# Altium PCB FingerVeinUSB_V1.PcbDoc
Units mm, origin at the board's own origin, x right, y up, seen from the top; angles counter-clockwise.
Board outline 40.25 x 50.25 mm, 2 copper layers (Top Layer, Bottom Layer); 32 components, 32 nets, 130 pads, 39 vias.
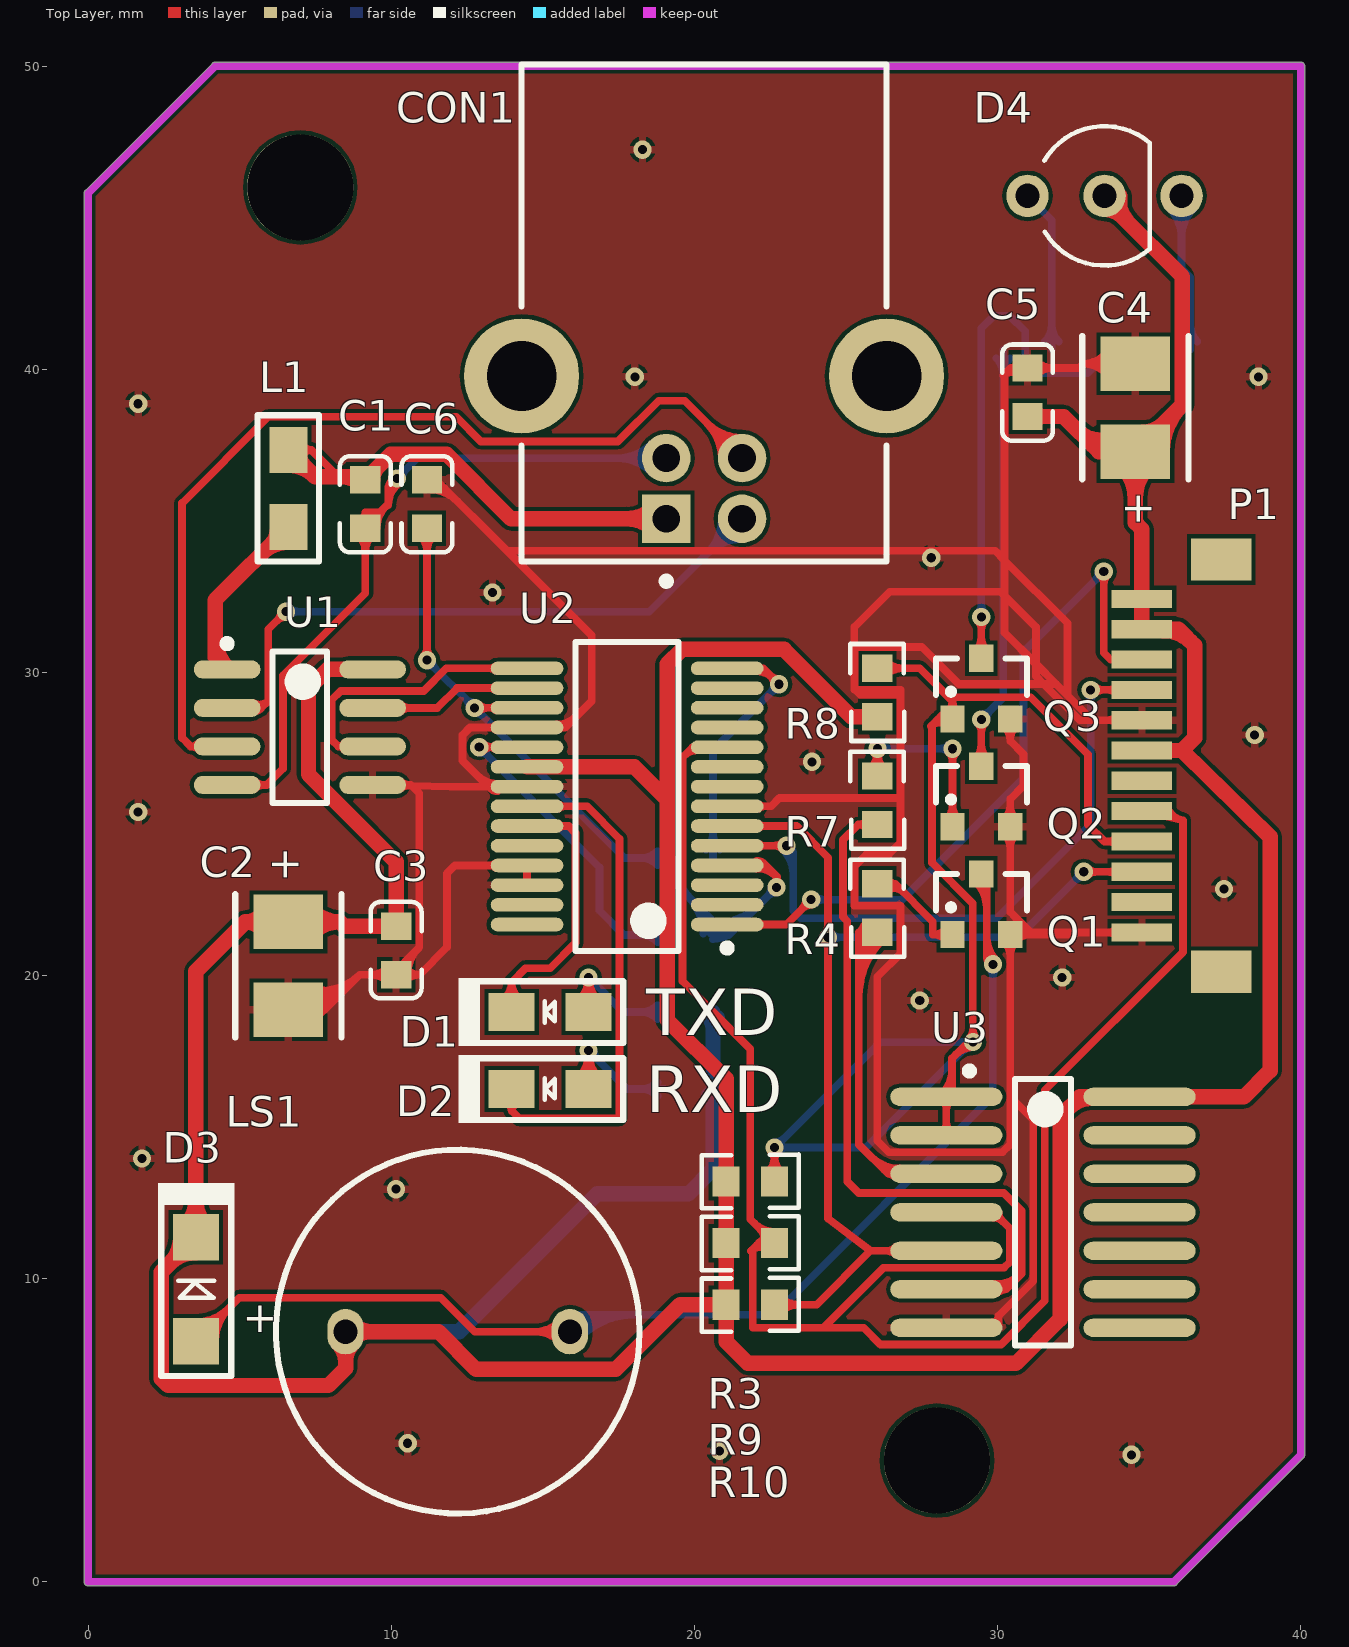
[diagram p0: Top Layer view]
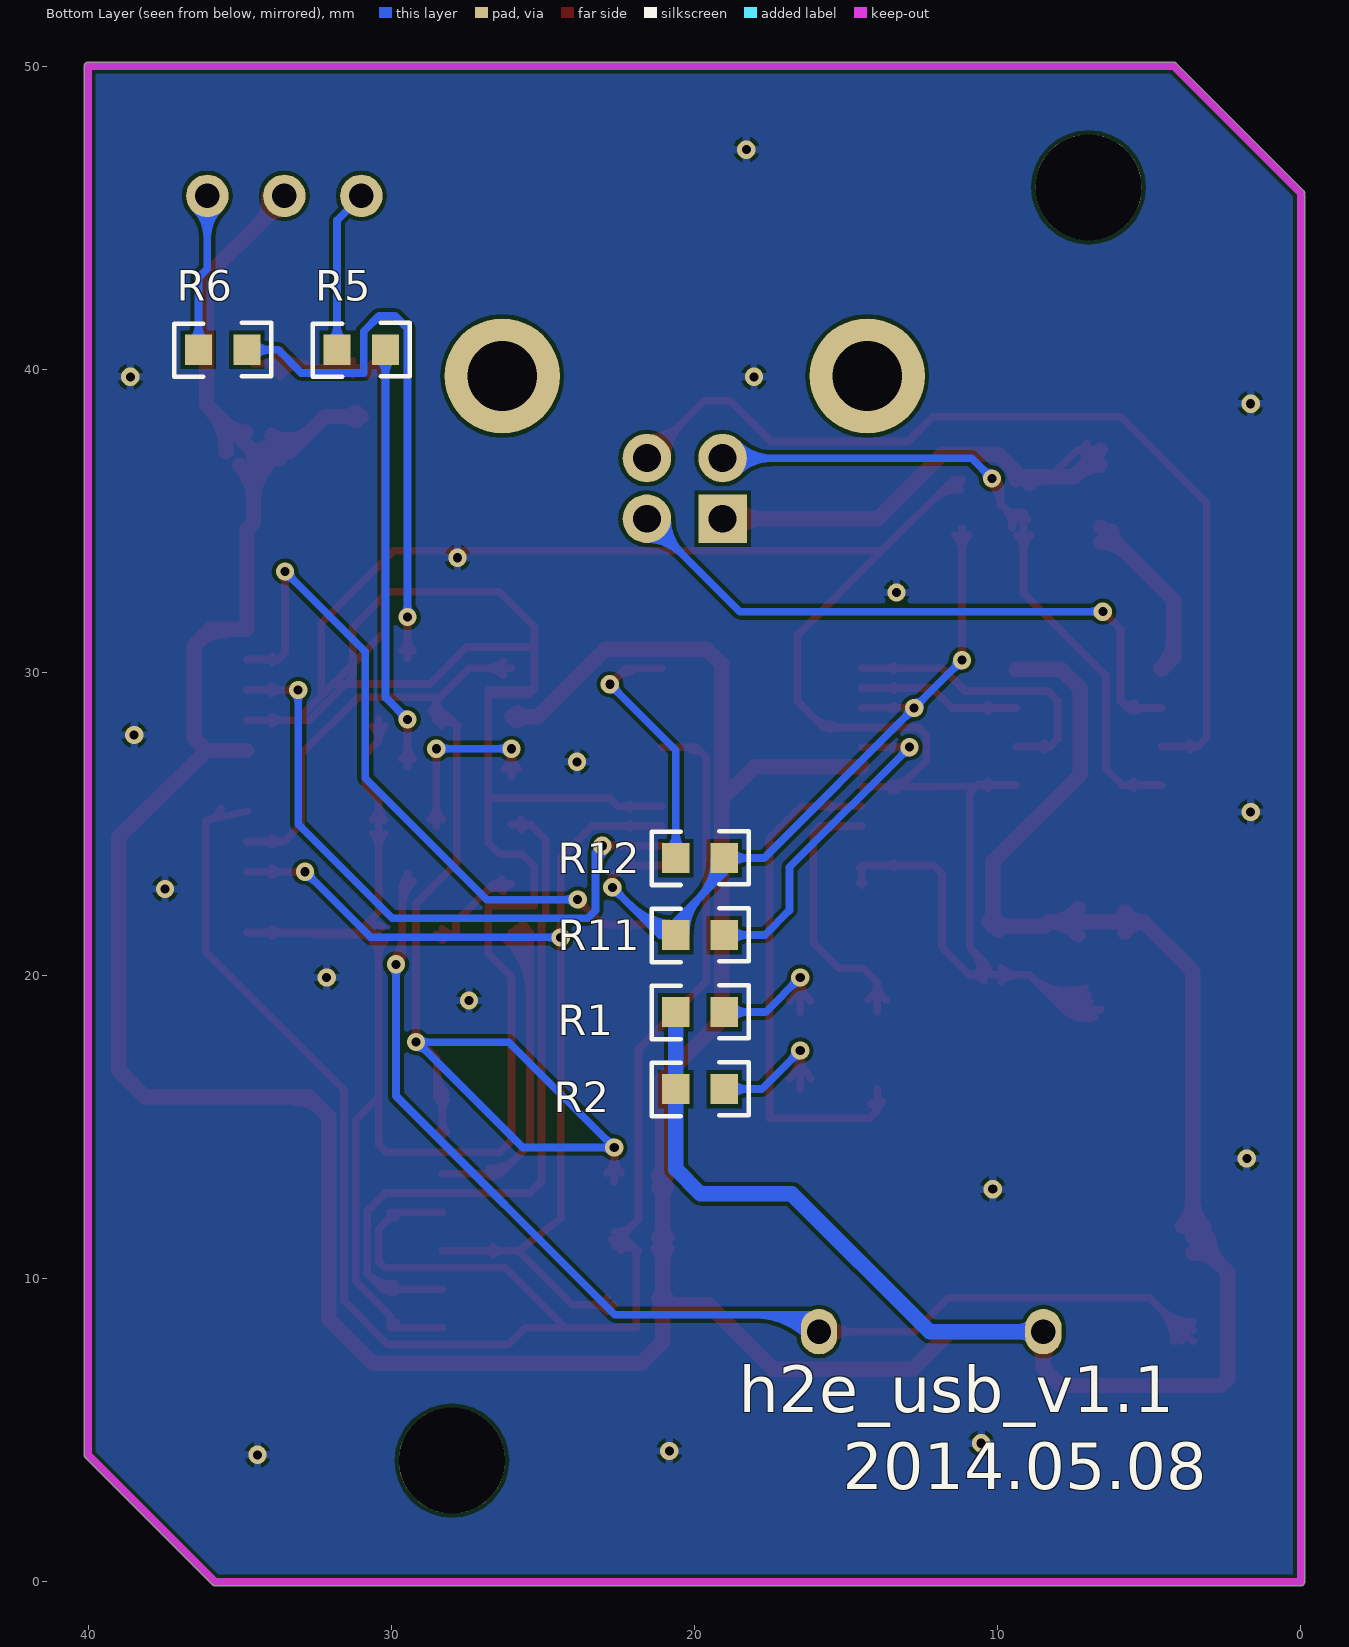
[diagram p1: Bottom Layer view, seen from below]
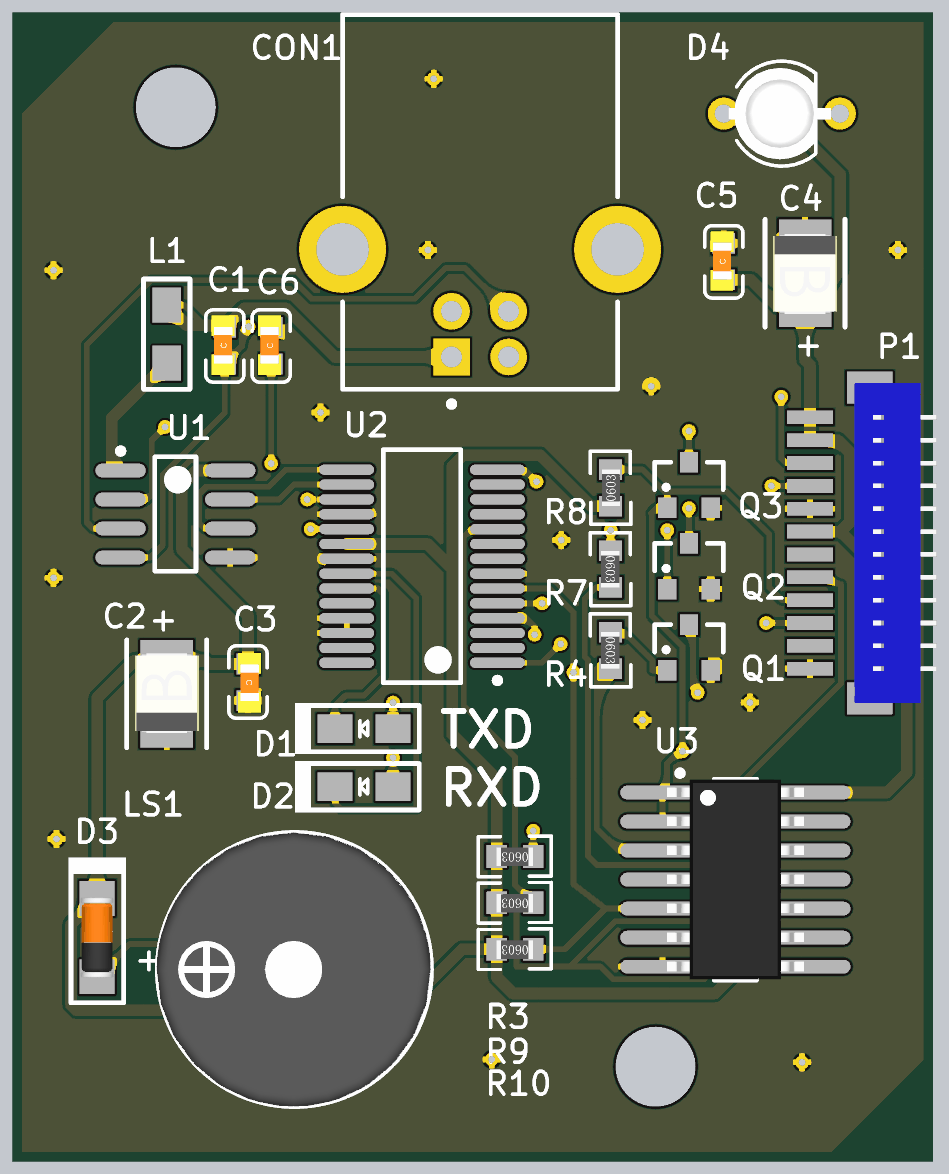
[diagram p2: 3D render of the assembled board from above, using the file's embedded part models]
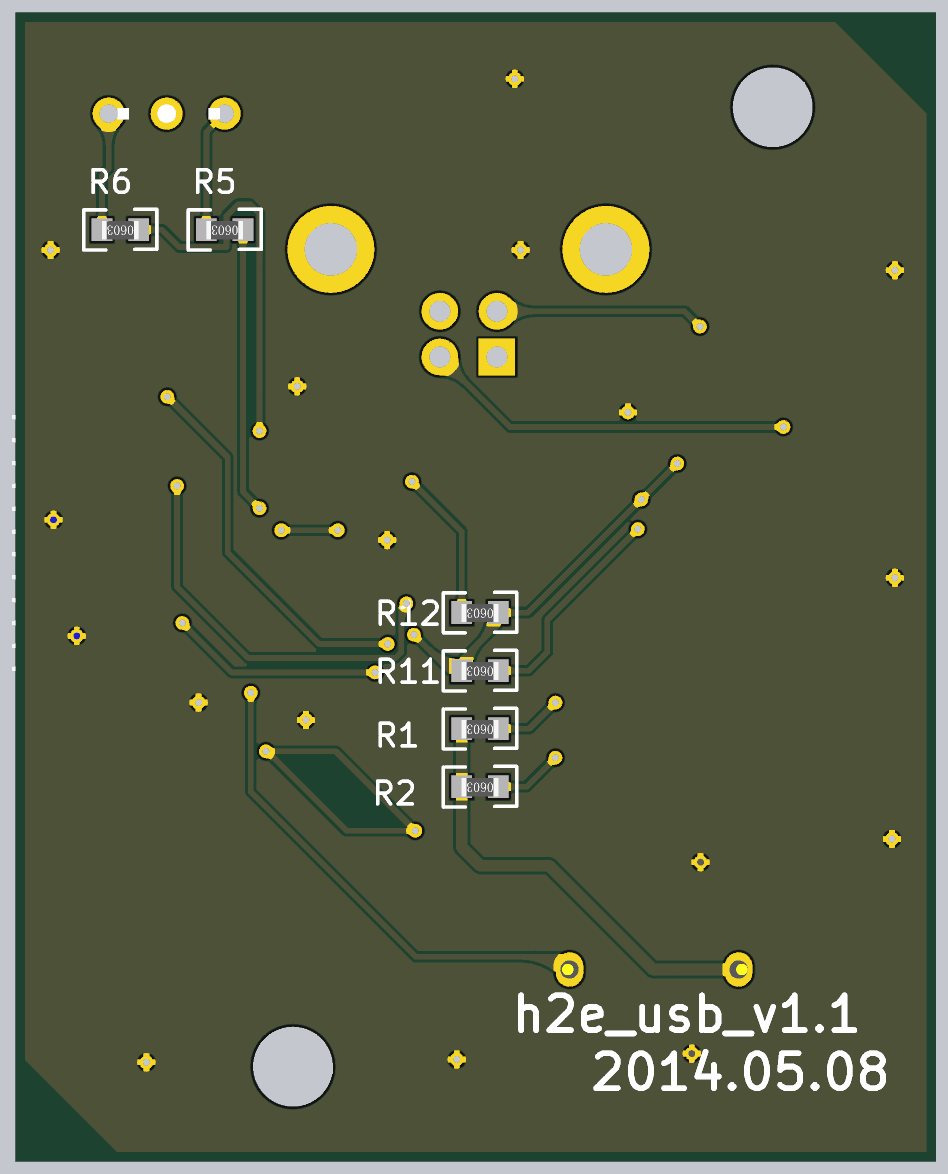
[diagram p3: 3D render of the assembled board from below, using the file's embedded part models]

## Layer stack, top to bottom
Top Layer: signal copper 0.0356
Dielectric: dielectric 0.32, FR-4, Dk 4.8
Bottom Layer: signal copper 0.0356

## Board outline
-0.127,0 -0.127,45.72 cw(c0,45.72) -0.119,45.765 cw(c0,45.809) -0.09,45.899 4.101,50.09 4.1,50.09 cw(c4.191,50) 4.191,50.127 40,50.127 cw(c40,50) 40.127,50 40.127,4.186 cw(c40,4.186) 40.09,4.096 35.904,-0.09 35.905,-0.09 cw(c35.814,0) 35.814,-0.127 0,-0.127 cw(c0,0)

## Design rules (kind name [scope] priority, off if disabled: settings)
Clearance [All] p1: gap=0.127
ComponentClearance [All] p1: gap=0 collisioncheckmode=3 verticalgap=0.254 showdistances=FALSE
MinimumSolderMaskSliver [All] p1: minsoldermaskwidth=0.01
PolygonConnect [All] p1: connectstyle=Relief reliefconductorwidth=0.254 reliefentries=4 polygonreliefangle="90 Angle"
RoutingVias [All] p1: holewidth=0.3 width=0.6 viastyle="Through Hole" minholewidth=0.3 minwidth=0.6 maxholewidth=0.3 maxwidth=0.6
SilkToSilkClearance [All] p1: silktosilkclearance=0.127
SilkscreenOverComponentPads [All] p1: minsilkscreentomaskgap=0
SolderMaskExpansion [All] p1: expansion=0.102
TestPointUsage [All] p1: valid=0 allowmultiple=FALSE
Testpoint [All] p1: side=15 testpointundercomponent=TRUE minsize=1.016 maxsize=2.54 preferedsize=1.524 minholesize=0 maxholesize=1.016 preferedholesize=0.813 testpointgrid=0.025 style=1023 order=0-112345678
Width Width_VCC [InNet('VCC')] p1: maxlimit=0.508 minlimit=0.254 preferedwidth=0.508
Width [All] p2: maxlimit=0.508 minlimit=0.254 preferedwidth=0.254
20 further rules are at their usual default settings.

## Classes and differential pairs
component class U_FT232: C1 C2 C3 C6 CON1 D1 D2 L1 R1 R2 R11 R12 U1 U2
component class U_H2E_Port: C4 C5 D3 D4 LS1 P1 Q1 Q2 Q3 R3 R4 R5 R6 R7 R8 R9 R10 U3

## Components (designator, comment, footprint, x,y, rotation, side; value= is the part's Value field where it differs from the comment)
C1 "CAP" C0603 9.144,35.56 r270 top
C2 "CAP+" T3528 6.604,20.32 r270 top
C3 "CAP" C0603 10.16,20.828 r90 top
C4 "CAP+" T3528 34.544,38.735 r90 top
C5 "CAP" C0603 30.988,39.243 r270 top
C6 "CAP" C0603 11.176,35.56 r270 top
CON1 "USB" USB2.5-2H4D 20.32,36.068 r90 top
D1 "LED" D0805 15.24,18.796 r180 top
D2 "LED" D0805 15.24,16.256 r180 top
D3 "1N4148" D1206 3.556,9.652 r90 top
D4 "LED_R&G_1" LED_R&G 33.528,45.72 r0 top
L1 "INDUCTOR" L0805 6.604,36.068 r270 top
LS1 "Speaker" BUZZER 12.192,8.255 r0 top
P1 "JST" "JST BM12B-SRSS-TB" 36.068,26.924 r270 top
Q1 "NPN" SOT23/BEC 29.464,22.352 r0 top
Q2 "NPN" SOT23/BEC 29.464,25.908 r0 top
Q3 "NPN" SOT23/BEC 29.464,29.464 r0 top
R1 "res" R0603 19.812,18.796 r0 bottom
R2 "res" R0603 19.812,16.256 r0 bottom
R3 "Res1" R0603 21.844,13.208 r180 top
R4 "Res1" R0603 26.035,22.225 r90 top
R5 "Res1" R0603 30.988,40.64 r0 bottom
R6 "Res1" R0603 35.56,40.64 r0 bottom
R7 "Res1" R0603 26.035,25.781 r90 top
R8 "Res1" R0603 26.035,29.337 r270 top
R9 "Res1" R0603 21.844,11.176 r180 top
R10 "Res1" R0603 21.844,9.144 r180 top
R11 "res" R0603 19.812,21.336 r0 bottom
R12 "res" R0603 19.812,23.876 r0 bottom
U1 "USB6Bx" SO8 6.985,28.194 r0 top
U2 "FT232" SSOP-28 17.78,25.908 r180 top
U3 "74ALS00" SOIC-14 31.496,12.192 r0 top

## Footprints (in the part's own frame and the unit in brackets; to place one, negate y for a bottom-side part, rotate by r counter-clockwise, add the part's x,y. Pads: shape width x height; smd on the part's side, far side on the other; paste and mask are expansions set on the pad)
BUZZER [mm]
  oval 1.2x1.5 hole 0.8: 1(-3.7,0) 2(3.7,0)
  silkscreen extent -6,-6 6,6, body extent -6.03,-6 5.97,6, height 9.3
C0603 [mm] "Chip Capacitor, 2-Leads, Body 1.6x0.8mm, IPC Medium Density"
  rect 0.9x1 smd: 1(-0.8,0) 2(0.8,0)
  silkscreen extent -1.57,-0.84 1.6,0.84, body extent -1.3,-0.51 1.3,0.49, height 0.89
D0805 [mm]
  rect 1.524x1.25 smd: 1(-1.27,0) 2(1.27,0)
  silkscreen extent -2.41,-1.12 3.02,1.12
D1206 [mil]
  rect 60x60 smd: 1(-67.5,0) 2(67.5,0)
  silkscreen extent -112,-50 138,49, body extent -69,-29 69,29, height 56
"JST BM12B-SRSS-TB" [mm] "BM12B-SRSS-TB"
  rect 1.4x2 smd: 0(-6.8,1.308) 0(6.8,1.308)
  rect 0.6x2 smd: 1(-5.5,-1.308) 2(-4.5,-1.308) 3(-3.5,-1.308) 4(-2.5,-1.308) 5(-1.5,-1.308) 6(-0.5,-1.308) 7(0.5,-1.308) 8(1.5,-1.308) 9(2.5,-1.308) 10(3.5,-1.308) 11(4.5,-1.308) 12(5.5,-1.308)
  body extent -7,-1.57 7,2.03, height 4.25
L0805 [mm]
  rect 1.524x1.25 smd: 1(-1.27,0) 2(1.27,0)
  silkscreen extent -2.41,-1.02 2.41,1.02
LED_R&G [mm]
  round 1.4 hole 0.8: 1(-2.54,0) 2(0,0) 3(2.54,0)
  silkscreen extent -1.98,-2.3 1.49,2.3, body extent -2.34,-2 2.16,2, height 12.43
R0603 [mm]
  rect 0.9x1 smd: 1(-0.8,0) 2(0.8,0)
  silkscreen extent -1.6,-0.89 1.6,0.89, body extent -0.8,-0.38 0.8,0.42, height 0.45
SO8 [mm] "SOIC, 8-Leads, Body 5.0x4.0mm (max), Pitch 1.27mm, IPC Medium Density"
  oval 2.2x0.6 smd: 1(-2.4,1.905) 2(-2.4,0.635) 3(-2.4,-0.635) 4(-2.4,-1.905) 5(2.4,-1.905) 6(2.4,-0.635) 7(2.4,0.635) 8(2.4,1.905)
  silkscreen extent -2.52,-2.5 0.9,2.88, body extent -2,-2.5 2,2.5, height 1.75
SOIC-14 [mm] "SOIC, 14-Leads, Body 8.8x4.0mm (max), Pitch 1.27mm, IPC Medium Density"
  oval 3.7x0.6 smd: 1(-3.187,3.81) 2(-3.187,2.54) 3(-3.187,1.27) 4(-3.187,0) 5(-3.187,-1.27) 6(-3.187,-2.54) 7(-3.187,-3.81) 8(3.187,-3.81) 9(3.187,-2.54) 10(3.187,-1.27) 11(3.187,0) 12(3.187,1.27) 13(3.187,2.54) 14(3.187,3.81)
  silkscreen extent -2.55,-4.4 0.93,4.78, body extent -3,-4.37 3,4.38, height 1.75
SOT23/BEC [mm]
  rect 0.8x0.9 smd: B(-0.95,-1) C(0,1) E(0.95,-1)
  silkscreen extent -1.5,-0.2 1.5,1
SSOP-28 [mm] "SOP, 28-Leads, Body 10.2x5.3mm (max), Pitch 0.65mm, IPC Medium Density"
  oval 2.4x0.45 smd: 1(-3.3,4.225) 2(-3.3,3.575) 3(-3.3,2.925) 4(-3.3,2.275) 5(-3.3,1.625) 6(-3.3,0.975) 7(-3.3,0.325) 8(-3.3,-0.325) 9(-3.3,-0.975) 10(-3.3,-1.625) 11(-3.3,-2.275) 12(-3.3,-2.925) 13(-3.3,-3.575) 14(-3.3,-4.225) 15(3.3,-4.225) 16(3.3,-3.575) 17(3.3,-2.925) 18(3.3,-2.275) 19(3.3,-1.625) 20(3.3,-0.975) 21(3.3,-0.325) 22(3.3,0.325) 23(3.3,0.975) 24(3.3,1.625) 25(3.3,2.275) 26(3.3,2.925) 27(3.3,3.575) 28(3.3,4.225)
  silkscreen extent -3.43,-5.1 1.7,5.12, body extent -2.65,-5.1 2.65,5.1, height 2
T3528 [mm] "Molded Capacitor, 2-Leads, Body 3.5x2.8mm, IPC Medium Density"
  rect 1.8x2.3 smd: 1(-1.45,0) 2(1.45,0)
  silkscreen extent -2.36,-1.75 2.36,1.75, body extent -1.78,-1.4 1.72,1.4, height 1.9
USB2.5-2H4D [mm] "Connector; USB1.1, Type B, Thru-Hole; 4 Position; Right Angle"
  rect 1.6x1.6 hole 0.92: 1(-1,1.25)
  round 1.6 hole 0.92: 2(-1,-1.25) 3(1,-1.25) 4(1,1.25)
  round 3.8 hole 2.3: 5(3.71,6.02) 6(3.71,-6.02)
  silkscreen extent -3.18,-6.02 13.99,6.02

## Part data
C1 C3 C5 C6: "Capacitor"
D3: library part "Diode 1N4148", "High Conductance Fast Diode"
LS1: "Loudspeaker"
P1: library part "Header 12", "Header, 12-Pin"
Q1 Q2 Q3: "NPN Transistor"
R3 R4 R5 R6 R7 R8 R9 R10: "Resistor"

## Free pads (board coordinates)
  round 3.5 hole 3.5 unplated: 0(7,46) 1(28,4)

## Via types
v1: diameter 0.6, hole 0.3, Top Layer to Bottom Layer, 39 vias

## Nets (pads, with @x,y where several pads share a name; then routed paths per layer and width w, separated by ;. In a path a pad name is that pad's centre, name@x,y a point inside that pad or via, vN(x,y) a via of type N, cw(c..) or ccw(c..) an arc to the next point about the centre after c; other vN are vias at no path point)
BUSY: P1.7
CTRLLED: R7.1 U3.6 | length 26.6
  Top Layer w0.254: R7.1@25.712,24.809 ccw(c25.4,24.613) 25.4,24.981 ; R7.1@25.712,25.153 cw(c25.4,25.349) 25.4,24.981 ; R7.1 25.4,24.981 ; U3.6 30.278,9.652 30.794,10.168 ; U3.6@29.853,9.571 ccw(c29.904,10.273) 30.401,9.775 ; U3.6@29.871,9.825 ccw(c29.957,11.006) 30.794,10.168 ; U3.6@29.981,9.53 cw(c30.277,9.234) 30.277,9.652 cw(c30.277,10.07) U3.6@29.981,9.774 ; 25.4,24.981 24.9,24.481 24.9,21.94 25.044,21.796 25.044,13.208 25.425,12.827 30.201,12.827 30.794,12.234 30.794,10.168
GND: C2.2 C3.1 C4.2 C5.1 C6.1 P1.5 P1.12 Q1.E Q2.E Q3.E U1.5 U2.7 U2.18 U2.21 U2.25 U2.26 U3.7 | length 222.6
  Top Layer w0.254: C2.2 7.798,18.87 ; C2.2@6.775,18.64 ccw(c7.1,19.584) 7.806,18.878 ; C2.2@6.858,18.88 ccw(c7.247,20.012) 8.093,19.166 ; C2.2@6.94,19.121 ccw(c7.395,20.439) 8.381,19.453 ; C2.2@7.023,19.361 ccw(c7.542,20.867) 8.668,19.741 ; C2.2@7.106,19.601 ccw(c7.689,21.295) 8.956,20.028 ; C2.2@7.612,18.718 cw(c7.798,18.68) 7.798,18.87 ; C2.2@7.612,19.022 ccw(c7.798,19.06) 7.798,18.87 ; C3.1@9.882,19.8 ccw(c9.33,19.248) 9.33,20.028 ccw(c9.33,20.808) C3.1@9.882,20.256 ; C3.1@10.279,20.028 cw(c10.903,20.028) C3.1@10.462,20.47 ; U1.5@10.305,26.164 cw(c10.552,25.905) 10.56,26.263 ; U1.5@10.307,26.167 cw(c10.603,25.871) 10.603,26.289 cw(c10.603,26.707) U1.5@10.307,26.411 ; U1.5@10.31,26.409 ccw(c10.655,26.739) 10.644,26.261 ; C3.1@10.45,19.812 cw(c10.935,19.376) 10.935,20.028 ; C3.1@10.45,20.244 ccw(c10.935,20.68) 10.935,20.028 ; C3.1@10.491,20.187 cw(c10.755,20.335) 10.541,20.549 ; C3.1@10.533,20.028 cw(c11.771,20.028) 10.896,20.903 ; C6.1 C6.1@11.468,36.36 ; 12.831,26.61 ccw(c13.505,27.285) U2.21@13.505,26.331 ; 13.264,26.177 ccw(c13.505,26.417) U2.21@13.505,26.077 ; U2.25@13.436,23.564 ccw(c13.268,23.396) 13.268,23.633 ccw(c13.268,23.87) U2.25@13.436,23.702 ; U2.18@13.436,28.114 ccw(c13.268,27.946) 13.268,28.183 ccw(c13.268,28.42) U2.18@13.436,28.252 ; U2.26@14.411,23.052 ccw(c14.243,23.22) 14.48,23.22 ccw(c14.717,23.22) U2.26@14.549,23.052 ; U2.25@14.411,23.564 cw(c14.243,23.396) 14.48,23.396 cw(c14.717,23.396) U2.25@14.549,23.564 ; U2.26 U2.25 12.101,23.633 11.836,23.368 11.836,20.93 10.935,20.028 ; U2.18@15.455,28.281 ccw(c15.455,29.198) 16.104,28.55 ; U2.18@15.524,28.114 cw(c15.692,27.946) 15.692,28.183 cw(c15.692,28.42) U2.18@15.524,28.252 ; U2.7 22.53,25.583 22.804,25.857 26.797,25.857 ; U2.7@22.124,25.514 cw(c22.292,25.346) 22.292,25.583 cw(c22.292,25.82) U2.7@22.124,25.652 ; U3.7 30.032,8.382 30.032,8.78 ; U3.7@29.835,8.553 ccw(c29.804,8.78) 30.032,8.78 ; 30.194,39.795 cw(c30.462,39.527) C5.1@30.719,39.806 ; Q2.E@30.221,24.665 cw(c29.755,24.199) 30.414,24.199 cw(c31.073,24.199) Q2.E@30.607,24.665 ; Q2.E@30.221,25.151 ccw(c29.755,25.617) 30.414,25.617 ccw(c31.073,25.617) Q2.E@30.607,25.151 ; Q3.E@30.221,28.221 cw(c29.755,27.755) 30.414,27.755 cw(c31.073,27.755) Q3.E@30.607,28.221 ; 30.246,39.847 cw(c30.677,39.416) C5.1@30.912,39.979 ; Q1.E@30.288,21.6 cw(c30.591,21.124) 30.99,21.523 ; 30.381,39.982 cw(c30.641,39.721) C5.1@30.891,39.992 ; Q3.E 30.414,27.741 30.856,27.298 30.856,26.265 30.414,25.823 Q2.E 30.414,22.1 30.788,21.726 31.09,21.424 32.609,21.424 ; 30.528,21.986 cw(c30.119,21.577) Q1.E@30.616,21.282 ; Q1.E@30.607,21.159 cw(c31.073,20.693) 31.073,21.352 cw(c31.073,22.011) Q1.E@30.607,21.545 ; C5.1@30.643,39.912 ccw(c30.442,39.823) 30.442,40.043 ; C5.1@30.643,40.174 cw(c30.442,40.263) 30.442,40.043 ; C5.1@31.266,39.815 cw(c31.818,39.263) 31.818,40.043 cw(c31.818,40.823) C5.1@31.266,40.271 ; C4.2@33.655,39.75 ccw(c32.832,39.189) 32.832,40.185 ; C4.2@33.655,40.62 cw(c32.832,41.181) 32.832,40.185 ; C4.2@33.865,39.893 ccw(c33.312,39.516) 33.312,40.185 ccw(c33.312,40.854) C4.2@33.865,40.477 ; C4.2 32.832,40.185 ; 7.798,18.87 8.956,20.028 ; 8.956,20.028 C3.1 ; C3.1 C3.1@10.541,20.028 ; C3.1 C3.1@10.541,20.028 ; C3.1@10.541,20.028 10.541,20.549 ; C3.1@10.541,20.028 10.935,20.028 ; 10.541,20.549 10.922,20.93 10.922,26.01 10.671,26.261 ; 10.671,26.261 11.943,26.233 13.208,26.233 ; 10.671,26.261 U1.5 10.643,26.289 10.671,26.261 ; C6.1@11.468,36.36 13.818,34.011 ; C6.1@11.468,36.36 13.818,34.011 ; 13.208,26.233 12.349,27.092 12.349,27.934 12.598,28.183 U2.18 15.737,28.183 16.612,29.058 16.612,31.217 13.818,34.011 ; 13.208,26.233 U2.21 13.208,26.233 ; 13.268,26.233 cw(c13.268,25.996) U2.21@13.436,26.164 ; 13.268,26.233 ccw(c13.268,26.47) U2.21@13.436,26.302 ; 13.268,26.233 cw(c13.268,25.996) U2.21@13.436,26.164 ; 13.268,26.233 ccw(c13.268,26.47) U2.21@13.436,26.302 ; 13.268,26.233 cw(c13.268,25.996) U2.21@13.436,26.164 ; 13.268,26.233 ccw(c13.268,26.47) U2.21@13.436,26.302 ; 13.268,26.233 cw(c13.268,25.996) U2.21@13.436,26.164 ; 13.268,26.233 ccw(c13.268,26.47) U2.21@13.436,26.302 ; 13.818,34.011 29.921,34.011 30.226,33.706 ; 25.281,29.456 25.281,30.841 27.503,30.841 28.727,29.616 31.523,29.616 ; 25.281,29.456 25.281,29.433 25.304,29.433 ; 25.281,29.456 25.273,29.464 25.273,31.496 26.441,32.664 30.099,32.664 30.226,32.537 ; 25.281,29.456 25.304,29.433 ; 25.304,29.433 26.797,29.433 26.797,29.261 ; 25.304,29.433 25.476,29.261 26.797,29.261 ; 26.797,25.857 26.797,29.261 ; 26.797,25.857 26.797,24.384 26.416,24.003 25.679,24.003 25.281,23.605 25.281,22.301 26.797,22.301 26.797,20.726 26.035,19.964 26.035,14.554 26.416,14.173 30.16,14.173 30.414,14.427 30.414,16.002 ; 30.032,8.78 31.175,9.923 31.175,15.241 30.414,16.002 ; 30.226,32.537 31.267,31.496 31.267,30.278 ; 30.226,32.537 30.226,33.706 ; 30.226,32.537 30.226,31.32 31.267,30.278 ; 30.226,33.706 32.309,31.623 32.309,29.237 ; 30.226,33.706 30.226,39.827 30.442,40.043 ; 30.414,16.002 Q1.E ; 30.414,16.002 Q1.E ; 30.414,20.643 cw(c31.073,20.643) 30.607,21.109 ccw(c31.073,20.643) 30.414,20.643 ; 30.414,20.643 ccw(c29.755,20.643) 30.221,21.109 cw(c29.755,20.643) 30.414,20.643 ; Q1.E 32.537,21.352 32.609,21.424 ; 30.442,40.043 C5.1 32.69,40.043 32.832,40.185 ; 31.267,30.278 31.929,29.616 ; 31.267,30.278 31.267,29.872 31.523,29.616 ; 31.523,29.616 32.715,28.424 33.122,28.424 ; 31.523,29.616 31.929,29.616 ; 31.929,29.616 32.309,29.237 ; 31.929,29.616 32.309,29.237 ; 32.309,29.237 33.122,28.424 ; 32.309,29.237 33.122,28.424 ; 32.309,29.237 33.122,28.424 ; 32.609,21.424 P1.12 32.609,21.424 ; 33.122,28.424 P1.5 33.122,28.424 ; 33.642,21.424 cw(c33.642,21.006) 33.938,21.302 ccw(c33.642,21.006) 33.642,21.424 ; 33.642,21.424 ccw(c33.642,21.842) 33.938,21.546 cw(c33.642,21.842) 33.642,21.424 ; 33.642,28.424 cw(c33.642,28.006) 33.938,28.302 ccw(c33.642,28.006) 33.642,28.424 ; 33.642,28.424 ccw(c33.642,28.842) 33.938,28.546 cw(c33.642,28.842) 33.642,28.424 ; C6.1@11.226,36.037 cw(c11.226,34.672) 12.191,35.637 ccw(c11.226,34.672) C6.1@11.226,36.037 ; C6.1@11.226,36.291 cw(c11.226,35.54) 11.757,36.071 ccw(c11.226,35.54) C6.1@11.226,36.291
  other v1: 34.417,4.191 20.828,4.318 10.541,4.572 10.16,12.954 1.778,13.97 27.432,19.177 32.131,19.939 37.465,22.86 1.651,25.4 23.876,27.051 38.481,27.94 13.335,32.639 27.813,33.782 1.651,38.862 18.034,39.751 38.608,39.751 18.288,47.244
NetC1_1: C1.1 CON1.1 L1.1 | length 23.4
  Top Layer w0.254: L1.1 7.366,37.338 ; L1.1@7.06,37.138 cw(c7.366,37.004) 7.366,37.338 ; L1.1@7.06,37.538 ccw(c7.366,37.672) 7.366,37.338 ; C1.1@8.859,36.138 ccw(c8.344,35.651) 8.344,36.36 ; C1.1@8.859,36.582 cw(c8.344,37.069) 8.344,36.36 ; C1.1 8.344,36.36 ; 7.366,37.338 8.255,36.449 8.344,36.36
  Top Layer w0.508: L1.1@6.604,36.83 cw(c6.604,35.604) 7.471,36.471 ; L1.1 7.493,36.449 9.144,36.449 9.233,36.449 9.975,37.191 11.834,37.191 13.957,35.068 CON1.1 ; L1.1@6.975,37.201 ccw(c7.54,37.201) L1.1@7.14,36.802 ; 8.406,36.449 cw(c8.406,35.672) C1.1@8.955,36.221 ; C1.1@9.39,36.36 cw(c9.984,36.36) C1.1@9.564,36.78 ; CON1.1@18.684,34.682 ccw(c17.752,33.75) 17.752,35.068 ccw(c17.752,36.386) CON1.1@18.684,35.454
NetC1_2: C1.2 CON1.4 U1.4 | length 33.4
  Top Layer w0.254: U1.4 5.893,26.289 6.426,26.822 6.426,29.896 9.144,32.614 C1.2 9.144,35.281 ; U1.4@5.507,26.167 cw(c5.803,25.871) 5.803,26.289 cw(c5.803,26.707) U1.4@5.507,26.411 ; C1.2@8.916,34.532 cw(c8.364,33.98) 9.144,33.98 cw(c9.924,33.98) C1.2@9.372,34.532 ; C1.2@9.001,35.049 ccw(c8.886,35.281) 9.144,35.281 ; C1.2@9.287,35.049 cw(c9.402,35.281) 9.144,35.281 ; C1.2@9.505,34.847 cw(c9.932,34.967) 9.619,35.281 ; C1.2@9.517,34.76 cw(c10.528,34.76) 9.813,35.475 ; 9.901,35.516 cw(c10.808,35.516) v1@10.285,36.257 ; 9.901,36.005 cw(c10.462,36.005) v1@10.139,36.464 ; v1(10.185,36.398) 9.901,36.113 9.901,35.563 9.619,35.281 ; 9.144,35.281 9.619,35.281 ; C1.2@9.194,35.083 ccw(c9.194,35.631) 9.582,35.244 cw(c9.194,35.631) C1.2@9.194,35.083
  Bottom Layer w0.254: v1(10.185,36.398) 10.855,37.068 CON1.4 ; v1@10.185,36.571 ccw(c10.185,36.989) 10.481,36.694 ccw(c10.776,36.398) v1@10.358,36.398 ; CON1.4@18.594,36.592 ccw(c17.445,35.443) 17.445,37.068 ccw(c17.445,38.693) CON1.4@18.594,37.544 ; CON1.4@18.774,36.772 ccw(c18.058,36.056) 18.058,37.068 ccw(c18.058,38.08) CON1.4@18.774,37.364
NetCON1_2: CON1.2 U1.2 | length 27.7
  Top Layer w0.254: U1.2 5.715,28.829 ; U1.2@5.348,28.757 ccw(c5.485,29.024) 5.698,28.812 ; U1.2@5.464,28.983 ccw(c5.653,29.348) 5.944,29.058 ; U1.2@5.527,28.731 cw(c5.715,28.601) 5.715,28.829 ; U1.2@5.527,28.927 ccw(c5.715,29.057) 5.715,28.829 ; v1@6.355,32.004 cw(c5.937,32.004) 6.232,31.709 cw(c6.528,31.413) v1@6.528,31.831 ; v1(6.528,32.004) 5.944,31.42 5.944,29.058 ; 5.715,28.829 5.944,29.058
  Bottom Layer w0.254: v1(6.528,32.004) 18.506,32.004 CON1.2 ; v1@6.65,31.882 cw(c6.945,31.586) 6.945,32.004 cw(c6.945,32.422) v1@6.65,32.126 ; CON1.2@20.897,35.068 cw(c19.272,35.068) 20.421,33.919 cw(c21.57,32.77) CON1.2@21.57,34.395 ; CON1.2@21.151,35.068 cw(c20.139,35.068) 20.855,34.353 cw(c21.57,33.637) CON1.2@21.57,34.649
NetCON1_3: CON1.3 U1.3 | length 35.4
  Top Layer w0.254: U1.3@3.66,27.439 ccw(c3.378,27.167) 3.378,27.559 ; U1.3@3.66,27.679 cw(c3.378,27.951) 3.378,27.559 ; U1.3 3.378,27.559 ; CON1.3@20.897,37.068 ccw(c19.272,37.068) 20.421,38.217 ccw(c21.57,39.366) CON1.3@21.57,37.741 ; CON1.3@21.151,37.068 ccw(c20.139,37.068) 20.855,37.783 ccw(c21.57,38.499) CON1.3@21.57,37.487 ; CON1.3 19.674,38.964 18.821,38.964 17.475,37.617 12.954,37.617 12.141,38.43 5.944,38.43 3.099,35.585 3.099,27.838 3.378,27.559
NetD1_1: D1.1 R1.1 | length 8.4
  Top Layer w0.254: D1.1@16.171,19.161 ccw(c15.447,19.939) v1(16.51,19.939) ; v1@16.388,19.817 cw(c16.092,19.521) 16.51,19.521 cw(c16.928,19.521) v1@16.632,19.817 ; D1.1 v1(16.51,19.939) ; D1.1@16.849,19.161 cw(c17.573,19.939) v1(16.51,19.939)
  Bottom Layer w0.254: v1@16.51,19.766 cw(c16.51,19.348) 16.805,19.644 cw(c17.101,19.939) v1@16.683,19.939 ; v1(16.51,19.939) 17.653,18.796 R1.1 ; R1.1@18.784,18.568 ccw(c18.232,18.016) 18.232,18.796 ccw(c18.232,19.576) R1.1@18.784,19.024
NetD1_2: D1.2 U2.23 | length 10.7
  Top Layer w0.254: D1.2@13.673,19.196 ccw(c13.234,19.787) 13.97,19.787 ; D1.2 13.97,19.787 ; D1.2@14.267,19.196 cw(c14.706,19.787) 13.97,19.787 ; U2.23 15.85,24.933 16.078,24.704 16.078,21.082 15.24,20.244 14.427,20.244 13.97,19.787 ; U2.23@15.524,24.864 cw(c15.692,24.696) 15.692,24.933 cw(c15.692,25.17) U2.23@15.524,25.002
NetD2_1: D2.1 R2.1 | length 8.7
  Top Layer w0.254: D2.1@16.158,16.608 ccw(c15.308,17.458) 16.51,17.458 ccw(c17.712,17.458) D2.1@16.862,16.608 ; v1@16.388,17.404 cw(c16.092,17.108) 16.51,17.108 cw(c16.928,17.108) v1@16.632,17.404 ; D2.1 v1(16.51,17.526)
  Bottom Layer w0.254: v1@16.51,17.353 cw(c16.51,16.935) 16.805,17.231 cw(c17.101,17.526) v1@16.683,17.526 ; v1(16.51,17.526) 17.78,16.256 R2.1 ; R2.1@18.784,16.028 ccw(c18.232,15.476) 18.232,16.256 ccw(c18.232,17.036) R2.1@18.784,16.484
NetD2_2: D2.2 U2.22 | length 18.8
  Top Layer w0.254: D2.2@13.8,15.788 cw(c13.711,15.545) 13.97,15.545 ; D2.2@13.807,15.858 cw(c13.561,15.532) 13.97,15.532 cw(c14.203,15.532) D2.2@14.172,15.762 ; D2.2 13.97,15.545 ; D2.2@14.14,15.788 ccw(c14.229,15.545) 13.97,15.545 ; U2.22 16.459,25.583 17.526,24.516 17.526,15.291 14.224,15.291 13.97,15.545 ; U2.22@15.524,25.514 cw(c15.692,25.346) 15.692,25.583 cw(c15.692,25.82) U2.22@15.524,25.652
NetD3_1: D3.1 LS1.2 Q1.C | length 52.4
  Top Layer w0.254: D3.1 4.991,9.373 11.633,9.373 12.751,8.255 LS1.2 ; D3.1@3.556,8.319 ccw(c3.556,9.238) 4.206,8.588 ccw(c4.857,7.938) D3.1@3.937,7.938 ; D3.1@3.556,8.572 ccw(c3.556,10.106) 4.64,9.022 ccw(c5.724,7.938) D3.1@4.191,7.938 ; LS1.2@15.558,7.921 ccw(c14.75,7.113) 14.75,8.255 ccw(c14.75,9.397) LS1.2@15.558,8.59 ; Q1.C@29.271,23.109 cw(c28.376,22.214) 29.642,22.214 ; Q1.C@29.411,23.034 cw(c29.357,22.754) 29.642,22.754 ; Q1.C@29.451,23.289 cw(c28.989,22.827) 29.642,22.827 ; Q1.C 29.464,22.962 29.642,22.784 29.642,20.574 v1(29.845,20.371) ; 29.642,20.666 ccw(c30.14,20.666) v1@29.788,20.314 ; 29.642,21.279 ccw(c30.753,21.279) v1@29.967,20.493
  Bottom Layer w0.254: LS1.2@15.867,8.43 cw(c16.794,7.503) 16.794,8.814 ; LS1.2 15.892,8.814 22.631,8.814 29.845,16.027 v1(29.845,20.371) ; LS1.2@16.047,8.25 cw(c17.407,6.89) 17.407,8.814 ; LS1.2@16.226,8.071 cw(c18.021,6.276) 18.021,8.814 ; v1@29.723,20.248 cw(c29.427,19.953) 29.845,19.953 cw(c30.263,19.953) v1@29.967,20.248
NetD4_1: D4.1 R5.2 | length 6.6
  Bottom Layer w0.254: D4.1 31.788,44.92 R5.2 ; R5.2@31.56,40.918 ccw(c31.008,41.47) 31.788,41.47 ccw(c32.568,41.47) R5.2@32.016,40.918
NetD4_3: D4.3 R6.2 | length 9.8
  Bottom Layer w0.254: D4.3@35.663,45.315 cw(c34.685,44.337) 36.068,44.337 cw(c37.451,44.337) D4.3@36.473,45.315 ; D4.3@35.842,45.494 cw(c35.298,44.95) 36.068,44.95 cw(c36.838,44.95) D4.3@36.294,45.494 ; D4.3 36.068,43.32 36.36,43.028 R6.2 ; R6.2@36.132,40.918 ccw(c35.58,41.47) 36.36,41.47 ccw(c37.14,41.47) R6.2@36.588,40.918
NetL1_2: L1.2 U1.1 | length 8.4
  Top Layer w0.508: 4.191,31.161 ccw(c5.647,31.161) U1.1@4.618,30.132 ; U1.1 4.191,30.493 4.191,32.385 L1.2 ; 5.737,33.931 cw(c6.604,33.064) L1.2@6.604,34.29 ; L1.2@6.068,34.262 ccw(c5.668,34.661) L1.2@6.233,34.661
NetQ1_B: Q1.B R4.2 | length 6.3
  Top Layer w0.254: R4.2 26.619,23.025 ; R4.2@26.13,22.973 cw(c26.4,22.659) 26.693,22.952 ; R4.2@26.296,22.78 cw(c26.579,22.451) 26.886,22.758 ; R4.2@26.371,22.875 cw(c26.619,22.745) 26.619,23.025 ; R4.2@26.371,23.175 ccw(c26.619,23.305) 26.619,23.025 ; Q1.B@28.319,21.161 ccw(c27.864,20.715) 27.864,21.352 ; Q1.B@28.319,21.543 cw(c27.864,21.989) 27.864,21.352 ; Q1.B 27.864,21.352 ; 26.619,23.025 27.864,21.78 27.864,21.352
NetQ2_B: Q2.B R7.2 | length 10.8
  Top Layer w0.254: R7.2@25.807,26.809 ccw(c25.255,27.361) 26.035,27.361 ccw(c26.815,27.361) R7.2@26.263,26.809 ; v1@25.913,27.36 cw(c25.617,27.065) 26.035,27.065 cw(c26.453,27.065) v1@26.157,27.36 ; R7.2 v1(26.035,27.483) ; Q2.B@28.321,25.151 ccw(c27.855,25.617) 28.514,25.617 ccw(c29.173,25.617) Q2.B@28.707,25.151 ; v1@28.392,27.36 cw(c28.096,27.065) 28.514,27.065 cw(c28.932,27.065) v1@28.636,27.36 ; Q2.B v1(28.514,27.483)
  Bottom Layer w0.254: v1(26.035,27.483) v1(28.514,27.483) ; v1@26.157,27.36 cw(c26.453,27.065) 26.453,27.483 cw(c26.453,27.9) v1@26.157,27.605 ; v1@28.392,27.36 ccw(c28.096,27.065) 28.096,27.483 ccw(c28.096,27.9) v1@28.392,27.605
NetQ2_C: Q2.C R5.1 | length 17.6
  Top Layer w0.254: Q2.C@29.271,27.151 ccw(c28.805,27.617) 29.464,27.617 ccw(c30.123,27.617) Q2.C@29.657,27.151 ; v1@29.342,28.326 cw(c29.046,28.03) 29.464,28.03 cw(c29.882,28.03) v1@29.586,28.326 ; Q2.C v1(29.464,28.448)
  Bottom Layer w0.254: v1(29.464,28.448) 30.188,29.172 R5.1 ; v1@29.464,28.621 ccw(c29.464,29.039) 29.759,28.743 ccw(c30.055,28.448) v1@29.637,28.448 ; R5.1@29.96,40.362 cw(c29.408,39.81) 30.188,39.81 cw(c30.968,39.81) R5.1@30.416,40.362
NetQ3_C: Q3.C R6.1 | length 21.8
  Top Layer w0.254: Q3.C@29.271,30.707 ccw(c28.805,31.173) 29.464,31.173 ccw(c30.123,31.173) Q3.C@29.657,30.707 ; v1@29.342,31.704 cw(c29.046,31.409) 29.464,31.409 cw(c29.882,31.409) v1@29.586,31.704 ; Q3.C v1(29.464,31.826)
  Bottom Layer w0.254: v1@29.342,31.949 ccw(c29.046,32.244) 29.464,32.244 ccw(c29.882,32.244) v1@29.586,31.949 ; v1(29.464,31.826) 29.464,41.351 29.87,41.758 30.404,41.758 30.912,41.25 30.912,39.878 32.969,39.878 33.731,40.64 R6.1 ; R6.1@34.532,40.412 ccw(c33.98,39.86) 33.98,40.64 ccw(c33.98,41.42) R6.1@34.532,40.868
NetR4_1: R4.1 U3.3 | length 19.2
  Top Layer w0.254: 25.425,19.294 cw(c28.116,19.294) R4.1@26.213,21.197 ; 25.425,19.907 cw(c27.503,19.907) R4.1@26.034,21.376 ; 25.425,20.521 cw(c26.89,20.521) R4.1@25.854,21.556 ; 25.425,21.134 cw(c26.276,21.134) R4.1@25.675,21.735 ; R4.1@25.705,21.263 ccw(c25.425,21.102) 25.425,21.425 ; R4.1@25.705,21.587 cw(c25.425,21.748) 25.425,21.425 ; 25.835,14.018 ccw(c26.759,14.942) U3.3@26.759,13.635 ; R4.1 25.425,21.425 ; 26.268,13.584 ccw(c26.759,14.075) U3.3@26.759,13.381 ; U3.3@26.626,13.352 ccw(c26.391,13.156) 26.391,13.462 ; U3.3@26.626,13.572 cw(c26.391,13.768) 26.391,13.462 ; U3.3 26.391,13.462 ; 25.425,21.425 25.425,14.427 26.391,13.462
NetR11_1: R11.1 U2.19 | length 14
  Top Layer w0.254: v1(12.903,27.534) U2.19 ; v1@13.026,27.411 cw(c13.319,27.117) U2.19@13.319,27.533 ; v1@13.026,27.656 ccw(c13.322,27.953) U2.19@13.322,27.533 ; U2.19@13.436,27.464 ccw(c13.268,27.296) 13.268,27.533 ccw(c13.268,27.77) U2.19@13.436,27.602
  Bottom Layer w0.254: v1@12.903,27.361 cw(c12.903,26.943) 13.199,27.238 cw(c13.494,27.534) v1@13.076,27.534 ; v1(12.903,27.534) 16.866,23.571 16.866,22.149 17.678,21.336 R11.1 ; R11.1@18.784,21.108 ccw(c18.232,20.556) 18.232,21.336 ccw(c18.232,22.116) R11.1@18.784,21.564
NetR12_2: R12.2 U2.14 | length 11.7
  Top Layer w0.254: U2.14 22.267,30.133 v1(22.79,29.61) ; U2.14@22.055,30.035 cw(c22.055,29.286) v1@22.585,29.816 ; v1@22.617,29.61 ccw(c22.199,29.61) 22.495,29.905 ccw(c22.79,30.201) v1@22.79,29.783
  Bottom Layer w0.254: R12.2@20.384,24.154 ccw(c19.832,24.706) 20.612,24.706 ccw(c21.392,24.706) R12.2@20.84,24.154 ; R12.2 20.612,27.432 v1(22.79,29.61) ; v1@22.617,29.61 cw(c22.199,29.61) 22.495,29.315 cw(c22.79,29.019) v1@22.79,29.437
NetU1_6: U1.6 U2.15 | length 10.4
  Top Layer w0.254: U1.6@8.443,27.461 ccw(c8.255,27.331) 8.255,27.559 ; U1.6@8.443,27.657 cw(c8.255,27.787) 8.255,27.559 ; U1.6 8.255,27.559 ; U2.15@13.436,30.064 ccw(c13.268,29.896) 13.268,30.133 ccw(c13.268,30.37) U2.15@13.436,30.202 ; U2.15 11.82,30.133 11.074,29.388 8.331,29.388 8.026,29.083 8.026,27.788 8.255,27.559
NetU1_7: U1.7 U2.16 | length 6.4
  Top Layer w0.254: U1.7 11.517,28.829 12.171,29.483 U2.16 ; U1.7@10.307,28.707 cw(c10.603,28.411) 10.603,28.829 cw(c10.603,29.247) U1.7@10.307,28.951 ; U2.16@13.436,29.414 ccw(c13.268,29.246) 13.268,29.483 ccw(c13.268,29.72) U2.16@13.436,29.552
PASS_DRVER: P1.9 Q3.B R3.1 R8.1 U3.1 U3.2 | length 60.8
  Top Layer w0.254: R3.1@22.416,13.486 ccw(c21.864,14.038) 22.644,14.038 ccw(c23.424,14.038) R3.1@22.872,13.486 ; v1@22.522,14.203 cw(c22.226,13.908) 22.644,13.908 cw(c23.062,13.908) v1@22.766,14.203 ; R3.1 v1(22.644,14.326) ; R8.1 27.435,30.137 28.514,29.058 ; R8.1@26.313,29.909 cw(c26.865,29.357) 26.865,30.137 cw(c26.865,30.917) R8.1@26.313,30.365 ; 27.805,28.228 cw(c28.087,27.946) Q3.B@28.34,28.253 ; 27.844,28.267 cw(c28.272,27.839) Q3.B@28.507,28.396 ; 28.003,28.425 cw(c28.266,28.163) Q3.B@28.502,28.449 ; 28.111,28.534 cw(c28.43,28.215) Q3.B@28.605,28.631 ; U3.2@28.187,14.854 ccw(c27.891,15.15) 28.309,15.15 ccw(c28.727,15.15) U3.2@28.431,14.854 ; U3.1@28.187,15.88 cw(c27.891,15.584) 28.309,15.584 cw(c28.727,15.584) U3.1@28.431,15.88 ; U3.1@28.187,16.124 ccw(c27.433,16.878) 28.499,16.878 ; Q3.B@28.277,28.328 ccw(c28.042,28.192) 28.042,28.464 ; Q3.B@28.277,28.6 cw(c28.042,28.736) 28.042,28.464 ; U3.2 U3.1 28.499,16.002 28.499,17.272 29.032,17.805 v1@29.134,17.805 ; U3.1@28.366,15.945 ccw(c28.046,16.265) U3.1@28.499,16.265 ; 28.629,17.402 cw(c29.185,16.847) v1@29.185,17.632 ; v1@29.062,17.928 ccw(c28.767,18.223) 29.185,18.223 ccw(c29.602,18.223) v1@29.307,17.928 ; v1(29.185,17.805) 29.185,22.377 27.838,23.724 27.838,28.261 28.042,28.464 ; P1.9@33.938,24.302 ccw(c33.642,24.006) 33.642,24.424 ccw(c33.642,24.842) P1.9@33.938,24.546 ; P1.9 33.528,24.424 32.98,24.972 32.98,27.294 31.09,29.185 28.514,29.185 28.514,29.058 ; 28.042,28.464 Q3.B ; Q3.B 28.514,29.058 ; Q3.B 28.514,29.058 ; 28.514,29.058 cw(c28.109,29.058) 28.351,28.733 ccw(c28.109,29.058) 28.514,29.058 ; 28.514,29.058 ccw(c28.919,29.058) 28.677,28.733 cw(c28.919,29.058) 28.514,29.058
  Bottom Layer w0.254: v1@22.644,14.499 ccw(c22.644,14.916) 22.939,14.621 ccw(c23.235,14.326) v1@22.817,14.326 ; v1@22.766,14.203 cw(c23.062,13.908) 23.062,14.326 cw(c23.062,14.743) v1@22.766,14.448 ; 28.803,17.474 cw(c29.185,17.092) v1@29.185,17.632 ; 28.925,17.597 ccw(c28.717,17.805) v1@29.012,17.805 ; v1@29.062,17.683 ccw(c28.767,17.388) 28.767,17.805 ccw(c28.767,18.223) v1@29.062,17.928 ; v1(29.185,17.805) v1@29.134,17.805 ; v1@29.134,17.805 26.124,17.805 v1(22.644,14.326) 25.654,14.326 v1@29.134,17.805
RESET: P1.11
RING: P1.10 R10.1 U2.6 U3.5 | length 44.5
  Top Layer w0.254: U2.6 23.368,24.933 24.409,23.892 ; U2.6@22.124,24.864 cw(c22.292,24.696) 22.292,24.933 cw(c22.292,25.17) U2.6@22.124,25.002 ; R10.1 24.028,9.144 25.806,10.922 ; R10.1@22.872,8.916 cw(c23.424,8.364) 23.424,9.144 cw(c23.424,9.924) R10.1@22.872,9.372 ; v1@24.287,21.137 cw(c23.992,20.842) 24.409,20.842 cw(c24.827,20.842) v1@24.532,21.137 ; U3.5@26.637,10.8 ccw(c26.341,10.504) 26.341,10.922 ccw(c26.341,11.34) U3.5@26.637,11.044 ; U3.5 25.806,10.922 ; v1(32.842,23.424) P1.10 ; v1@32.965,23.302 cw(c33.26,23.006) 33.26,23.424 cw(c33.26,23.842) v1@32.965,23.546 ; P1.10@33.938,23.302 ccw(c33.642,23.006) 33.642,23.424 ccw(c33.642,23.842) P1.10@33.938,23.546 ; v1(24.409,21.26) 24.409,23.892 ; v1(24.409,21.26) 24.409,11.989 25.806,10.922 ; v1(24.409,21.26) 24.409,23.892 ; 24.409,21.677 cw(c23.992,21.677) 24.287,21.382 ccw(c23.992,21.677) 24.409,21.677 ; 24.409,21.677 ccw(c24.827,21.677) 24.532,21.382 cw(c24.827,21.677) 24.409,21.677
  Bottom Layer w0.254: v1(24.409,21.26) 30.678,21.26 v1(32.842,23.424) ; v1@24.532,21.137 cw(c24.827,20.842) 24.827,21.26 cw(c24.827,21.677) v1@24.532,21.382 ; v1@32.669,23.424 cw(c32.252,23.424) 32.547,23.129 cw(c32.842,22.833) v1@32.842,23.251
RLSD: P1.8 R9.1 U2.10 U3.4 | length 70.9
  Top Layer w0.254: 19.653,27.248 cw(c20.105,26.796) U2.10@20.105,27.435 ; U2.10 19.938,27.533 19.609,27.203 19.609,19.812 21.844,17.577 21.844,11.963 R9.1@22.631,11.176 ; 21.863,10.916 cw(c22.156,10.623) R9.1@22.43,10.934 ; 21.888,10.941 cw(c22.338,10.491) R9.1@22.614,11.064 ; 21.986,11.822 ccw(c22.644,12.48) R9.1@22.644,11.549 ; 22.055,11.107 cw(c22.336,10.826) R9.1@22.598,11.124 ; 22.137,11.671 cw(c21.692,11.226) R9.1@22.321,11.226 ; 22.141,11.194 cw(c22.502,10.832) R9.1@22.724,11.293 ; R9.1@22.355,11.033 ccw(c22.123,10.918) 22.123,11.176 ; R9.1@22.355,11.319 cw(c22.123,11.434) 22.123,11.176 ; U3.4 29.87,12.192 30.413,11.649 30.413,10.566 30.21,10.363 26.238,10.363 24.257,8.382 ; U3.4@29.859,12.019 cw(c29.859,11.574) 30.174,11.889 ; U3.4@30.032,12.192 ccw(c30.422,12.192) 30.146,11.916 ; P1.8 36.119,25.116 36.119,20.777 31.556,16.214 31.556,9.271 30.113,7.828 26.137,7.828 25.583,8.382 24.257,8.382 ; P1.8@35.616,25.498 ccw(c36.236,25.793) 36.085,25.124 ; 21.92,8.382 24.257,8.382 ; 21.92,8.382 21.92,10.973 22.123,11.176 ; 21.92,8.382 24.257,8.382 ; 22.123,11.176 R9.1@22.631,11.176 ; R9.1@22.631,11.176 R9.1 R9.1@22.631,11.176
RXD_FT: P1.4 U2.5 | length 25.9
  Top Layer w0.254: U2.5 v1(23.038,24.283) ; U2.5@22.124,24.214 cw(c22.292,24.046) 22.292,24.283 cw(c22.292,24.52) U2.5@22.124,24.352 ; v1@22.915,24.161 ccw(c22.62,23.865) 22.62,24.283 ccw(c22.62,24.701) v1@22.915,24.405 ; v1(33.071,29.424) P1.4 ; v1@33.193,29.302 cw(c33.488,29.006) 33.488,29.424 cw(c33.488,29.842) v1@33.193,29.546 ; P1.4@33.938,29.302 ccw(c33.642,29.006) 33.642,29.424 ccw(c33.642,29.842) P1.4@33.938,29.546
  Bottom Layer w0.254: v1@22.915,24.161 cw(c22.08,23.325) 23.262,23.325 ; v1(23.038,24.283) 23.262,24.059 23.262,22.149 23.516,21.895 29.972,21.895 33.071,24.994 v1(33.071,29.424) ; v1@23.095,24.34 cw(c22.693,23.938) 23.262,23.938 ; v1@32.948,29.302 cw(c32.653,29.006) 33.071,29.006 cw(c33.488,29.006) v1@33.193,29.302
RXD_H2E: P1.3 U2.1 | length 27.1
  Top Layer w0.254: U2.1 23.029,21.683 v1(23.851,22.504) ; U2.1@22.124,21.614 cw(c22.292,21.446) 22.292,21.683 cw(c22.292,21.92) U2.1@22.124,21.752 ; v1@23.678,22.504 cw(c23.26,22.504) 23.555,22.209 cw(c23.851,21.914) v1@23.851,22.331 ; v1@33.38,33.202 cw(c33.085,32.907) 33.503,32.907 cw(c33.92,32.907) v1@33.625,33.202 ; v1(33.503,33.325) 33.503,30.653 33.731,30.424 ; P1.3@33.917,30.326 ccw(c33.731,30.198) 33.731,30.424 ; P1.3@33.917,30.522 cw(c33.731,30.65) 33.731,30.424 ; P1.3 33.731,30.424
  Bottom Layer w0.254: v1(23.851,22.504) 26.848,22.504 30.856,26.513 30.856,30.678 v1(33.503,33.325) ; v1@23.973,22.382 cw(c24.268,22.087) 24.268,22.504 cw(c24.268,22.922) v1@23.973,22.627 ; v1@33.33,33.325 cw(c32.912,33.325) 33.207,33.029 cw(c33.503,32.734) v1@33.503,33.152
VCC: C2.1 C3.2 C4.1 C5.2 D3.2 D4.2 LS1.1 P1.1 P1.2 P1.6 R1.2 R2.2 R3.2 R8.2 R9.2 R10.2 U1.8 U2.20 U3.14 | length 217.2
  Top Layer w0.508: D3.2@3.048,11.367 cw(c1.822,11.367) 2.689,10.499 cw(c3.556,9.632) D3.2@3.556,10.858 ; D3.2@3.197,11.726 ccw(c2.33,12.593) 3.556,12.593 ccw(c4.782,12.593) D3.2@3.915,11.726 ; C2.1@5.807,21.426 ccw(c5.184,21.033) 5.184,21.77 ; C2.1@5.807,22.114 cw(c5.184,22.507) 5.184,21.77 ; C2.1@7.334,21.338 cw(c8.306,20.462) 8.306,21.77 ; C2.1@7.334,22.202 ccw(c8.306,23.078) 8.306,21.77 ; LS1.1@8.247,7.86 cw(c7.657,7.27) 8.492,7.27 cw(c9.327,7.27) LS1.1@8.737,7.86 ; LS1.1@8.737,8.01 cw(c9.327,7.42) 9.327,8.255 cw(c9.327,9.09) LS1.1@8.737,8.5 ; U1.8 7.904,30.099 7.269,29.464 7.269,26.64 10.16,23.749 C3.2 8.448,21.628 8.306,21.77 ; C3.2@9.971,21.489 ccw(c9.637,21.155) 9.637,21.628 ccw(c9.637,22.101) C3.2@9.971,21.767 ; C3.2@10.021,21.767 ccw(c9.687,22.101) 10.16,22.101 ccw(c10.633,22.101) C3.2@10.299,21.767 ; U2.20 18.024,26.883 19.101,25.806 ; R10.2@20.905,8.955 cw(c20.571,8.621) 21.044,8.621 cw(c21.517,8.621) R10.2@21.183,8.955 ; R10.2@20.905,9.005 ccw(c20.571,8.671) 20.571,9.144 ccw(c20.571,9.617) R10.2@20.905,9.283 ; R10.2@20.905,9.333 ccw(c20.571,9.667) 21.044,9.667 ccw(c21.517,9.667) R10.2@21.183,9.333 ; R9.2@20.905,10.987 cw(c20.571,10.653) 21.044,10.653 cw(c21.517,10.653) R9.2@21.183,10.987 ; R9.2@20.905,11.365 ccw(c20.571,11.699) 21.044,11.699 ccw(c21.517,11.699) R9.2@21.183,11.365 ; R3.2@20.905,13.019 cw(c20.571,12.685) 21.044,12.685 cw(c21.517,12.685) R3.2@21.183,13.019 ; R3.2@20.905,13.397 ccw(c20.571,13.731) 21.044,13.731 ccw(c21.517,13.731) R3.2@21.183,13.397 ; R8.2@25.846,28.398 ccw(c25.512,28.064) 25.512,28.537 ccw(c25.512,29.01) R8.2@25.846,28.676 ; R8.2 25.179,28.537 22.957,30.759 19.583,30.759 19.101,30.277 19.101,25.806 ; C5.2 32.182,38.443 33.34,37.285 ; C5.2@31.177,38.304 cw(c31.511,37.97) 31.511,38.443 cw(c31.511,38.916) C5.2@31.177,38.582 ; 32.341,15.628 cw(c33.133,14.836) U3.14@33.133,15.956 ; 32.506,15.793 cw(c32.956,15.343) U3.14@33.121,15.958 ; 32.659,37.966 ccw(c33.387,38.694) C4.1@33.944,37.828 ; 33.104,37.52 ccw(c33.736,38.152) C4.1@34.219,37.401 ; D4.2@33.528,45.274 cw(c33.528,44.443) 34.116,45.03 ; D4.2 34.036,45.72 34.036,45.11 36.093,43.053 36.093,38.834 C4.1 ; C4.1@33.694,37.045 ccw(c33.34,36.903) 33.34,37.285 ; C4.1@33.694,37.525 cw(c33.34,37.667) 33.34,37.285 ; D4.2@33.974,45.72 ccw(c35.296,45.72) 34.361,44.785 ; C4.1@34.087,36.828 cw(c32.984,35.725) 34.544,35.725 cw(c36.104,35.725) C4.1@35.001,36.828 ; P1.6 36.085,27.424 ; C4.1@34.794,37.931 ccw(c34.794,38.887) 35.47,38.211 ; C4.1@35.44,37.285 cw(c37.603,37.285) 36.074,38.815 ; P1.2@35.46,31.378 cw(c35.46,30.045) 36.403,30.987 ; P1.2@35.471,31.379 cw(c35.661,30.612) 36.22,31.171 ; 5.184,21.77 C2.1 8.306,21.77 ; 5.184,21.77 3.556,20.142 D3.2 2.413,10.223 2.413,6.706 2.642,6.477 7.925,6.477 8.492,7.044 LS1.1 11.557,8.255 12.802,7.01 17.399,7.01 19.533,9.144 R10.2 ; 19.101,18.542 19.101,25.806 ; 19.101,18.542 19.101,25.806 ; 19.101,18.542 21.044,16.599 R3.2 R9.2 R10.2 ; R10.2 21.044,7.925 21.763,7.206 30.601,7.206 32.064,8.669 32.064,15.351 32.715,16.002 U3.14 38.125,16.002 38.989,16.866 38.989,24.579 36.085,27.424 ; 33.34,37.285 C4.1 ; C4.1 34.544,34.938 34.76,34.722 P1.1 P1.2 35.966,31.424 36.5,30.891 36.5,27.838 36.085,27.424
  Bottom Layer w0.508: LS1.1 12.243,8.255 16.789,12.802 19.799,12.802 20.612,13.614 R2.2 R1.2 ; LS1.1@8.737,8.01 cw(c9.327,7.42) 9.327,8.255 cw(c9.327,9.09) LS1.1@8.737,8.5 ; R2.2@20.473,16.067 cw(c20.139,15.733) 20.612,15.733 cw(c21.085,15.733) R2.2@20.751,16.067 ; R1.2@20.473,18.607 cw(c20.139,18.273) 20.612,18.273 cw(c21.085,18.273) R1.2@20.751,18.607
VCCIO: C6.2 R11.2 R12.1 U2.4 U2.17 | length 49.8
  Top Layer w0.254: C6.2@10.948,34.532 cw(c10.396,33.98) 11.176,33.98 cw(c11.956,33.98) C6.2@11.404,34.532 ; v1@11.054,30.526 ccw(c10.758,30.821) 11.176,30.821 ccw(c11.594,30.821) v1@11.298,30.526 ; v1(11.176,30.404) C6.2 ; v1(12.751,28.829) 12.755,28.833 U2.17 ; v1@12.873,28.707 cw(c13.178,28.402) 13.178,28.833 ; v1@12.873,28.951 ccw(c13.159,29.237) 13.159,28.833 ; U2.17@13.436,28.764 ccw(c13.268,28.596) 13.268,28.833 ccw(c13.268,29.07) U2.17@13.436,28.902 ; U2.4 22.352,23.633 22.708,23.277 v1(22.708,22.911) ; U2.4@22.055,23.535 cw(c22.055,22.581) 22.729,23.256 ; U2.4@22.055,23.789 cw(c22.055,23.449) 22.296,23.689 ; U2.4@22.1,23.546 cw(c22.258,23.242) 22.5,23.485 ; U2.4@22.124,23.564 cw(c22.292,23.396) 22.292,23.633 cw(c22.292,23.87) U2.4@22.124,23.702 ; 22.593,23.392 cw(c22.121,22.92) v1@22.789,22.91
  Bottom Layer w0.254: v1@11.176,30.231 cw(c11.176,29.813) 11.471,30.108 cw(c11.767,30.404) v1@11.349,30.404 ; v1(11.176,30.404) v1(12.751,28.829) ; v1@12.578,28.829 ccw(c12.16,28.829) 12.455,29.124 ccw(c12.751,29.42) v1@12.751,29.002 ; R12.1@18.784,23.648 ccw(c18.232,23.096) 18.232,23.876 ccw(c18.232,24.656) R12.1@18.784,24.104 ; R12.1@19.081,23.826 ccw(c20.293,23.826) 19.436,22.969 ; R12.1@19.335,23.826 ccw(c21.16,23.826) 19.869,22.536 ; 19.773,22.632 cw(c18.526,21.386) R11.2@20.289,21.386 ; 20.206,22.199 cw(c19.393,21.386) R11.2@20.543,21.386 ; R11.2@20.612,21.201 ccw(c20.612,22.133) 21.271,21.474 ; R11.2@20.612,21.455 ccw(c20.612,23) 21.704,21.907 ; R11.2@20.612,21.709 ccw(c20.612,23.867) 22.138,22.341 ; v1@22.535,22.911 cw(c22.117,22.911) 22.412,22.615 cw(c22.708,22.32) v1@22.708,22.738 ; v1(22.708,22.911) 21.133,21.336 R11.2 20.612,21.793 19.012,23.393 R12.1 17.704,23.876 ; v1(12.751,28.829) 17.704,23.876 ; v1(12.751,28.829) 17.704,23.876 ; 13.046,28.534 cw(c13.341,28.829) 12.924,28.829 ccw(c13.341,28.829) 13.046,28.534 ; 13.046,28.534 ccw(c12.751,28.238) 12.751,28.656 cw(c12.751,28.238) 13.046,28.534
pads on no net: CON1.5 CON1.6 P1.0 U2.2 U2.3 U2.8 U2.9 U2.11 U2.12 U2.13 U2.24 U2.27 U2.28 U3.8 U3.9 U3.10 U3.11 U3.12 U3.13

## Polygon pours and split planes (outlines as drawn)
GND on Top Layer "Top Layer-No Net" (solid, remove dead copper, pour order 1000): 19.431,54.61 -4.191,54.61 -4.191,21.463 -4.191,-5.461 23.876,-5.461 43.815,-5.461 43.815,24.13 43.815,54.61 19.431,54.61
GND on Bottom Layer "Top Layer-No Net" (solid, remove dead copper, pour order 1001): 22.352,52.959 50.8,52.959 50.8,25.527 50.8,-6.604 14.732,-6.604 -6.731,-6.604 -6.731,25.527 -6.731,53.086 22.479,53.086

## Keep-outs
Keep-Out Layer:
  lines w0.254: 0,0 35.814,0 40,4.186 40,50 4.191,50 0,45.809 0,45.72 0,0

## Silkscreen, mask and mechanical layers (free items; w line width, h text height)
Top Overlay:
  text "TXD" at 18.415,18.034 h1.52
  text "RXD" at 18.415,15.494 h1.52
Bottom Overlay:
  text "h2e_usb_v1.1" at 18.542,5.588 h1.52
  text "2014.05.08" at 15.113,3.048 h1.52

## Text inside footprints (layer, text, board x,y; h text height)
C2: Top Overlay "+" at 6.071,24.232 h1 r270
C4: Top Overlay "+" at 35.077,34.823 h1 r90
LS1: Top Overlay "+" at 5.105,8.242 h1